# Altium PCB SDP.PcbDoc
Units mm, origin at the board's own origin, x right, y up, seen from the top; angles counter-clockwise.
Board outline 64 x 80 mm, 2 copper layers (Top Layer, Bottom Layer), stack 1.572 mm thick; 3 components, 0 nets, 43 pads, 0 vias.
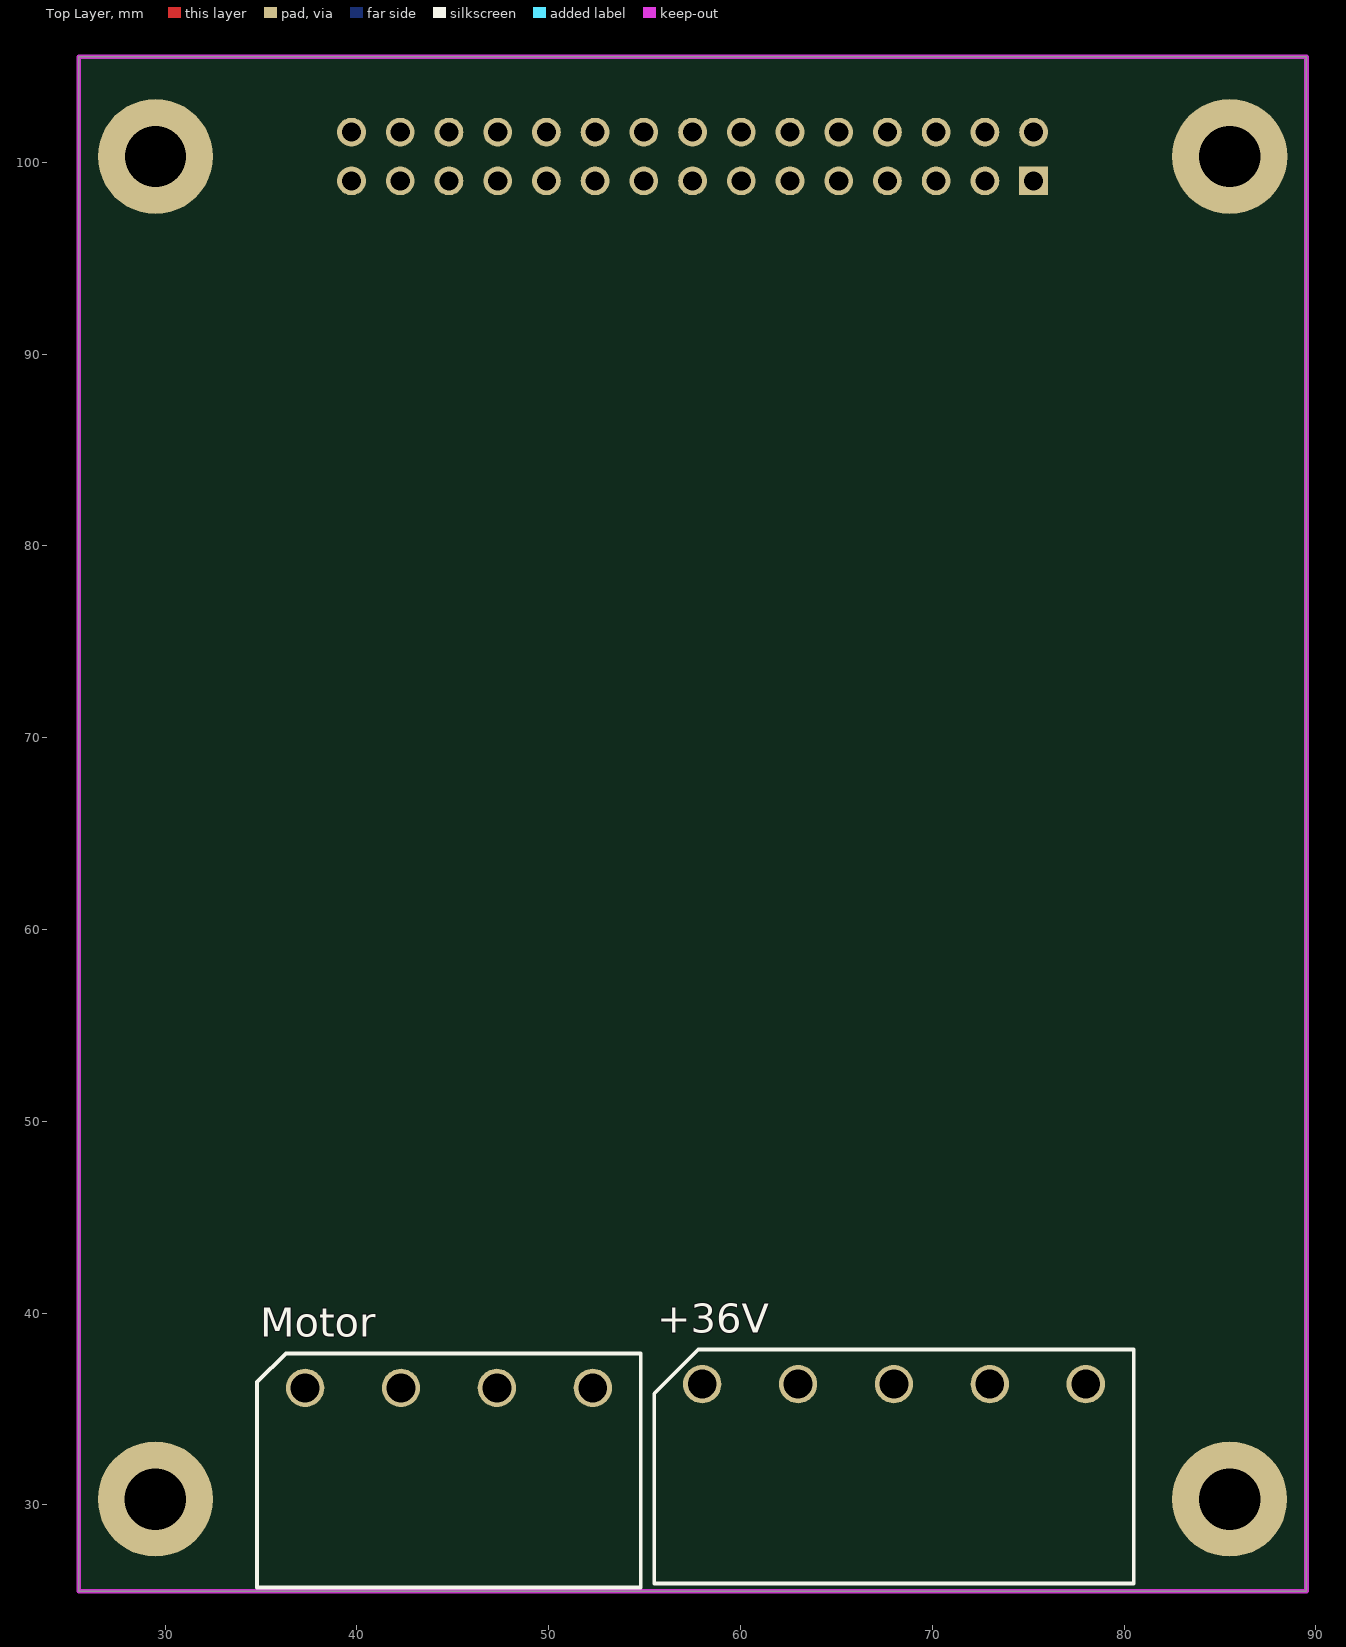
[diagram p0: Top Layer view]
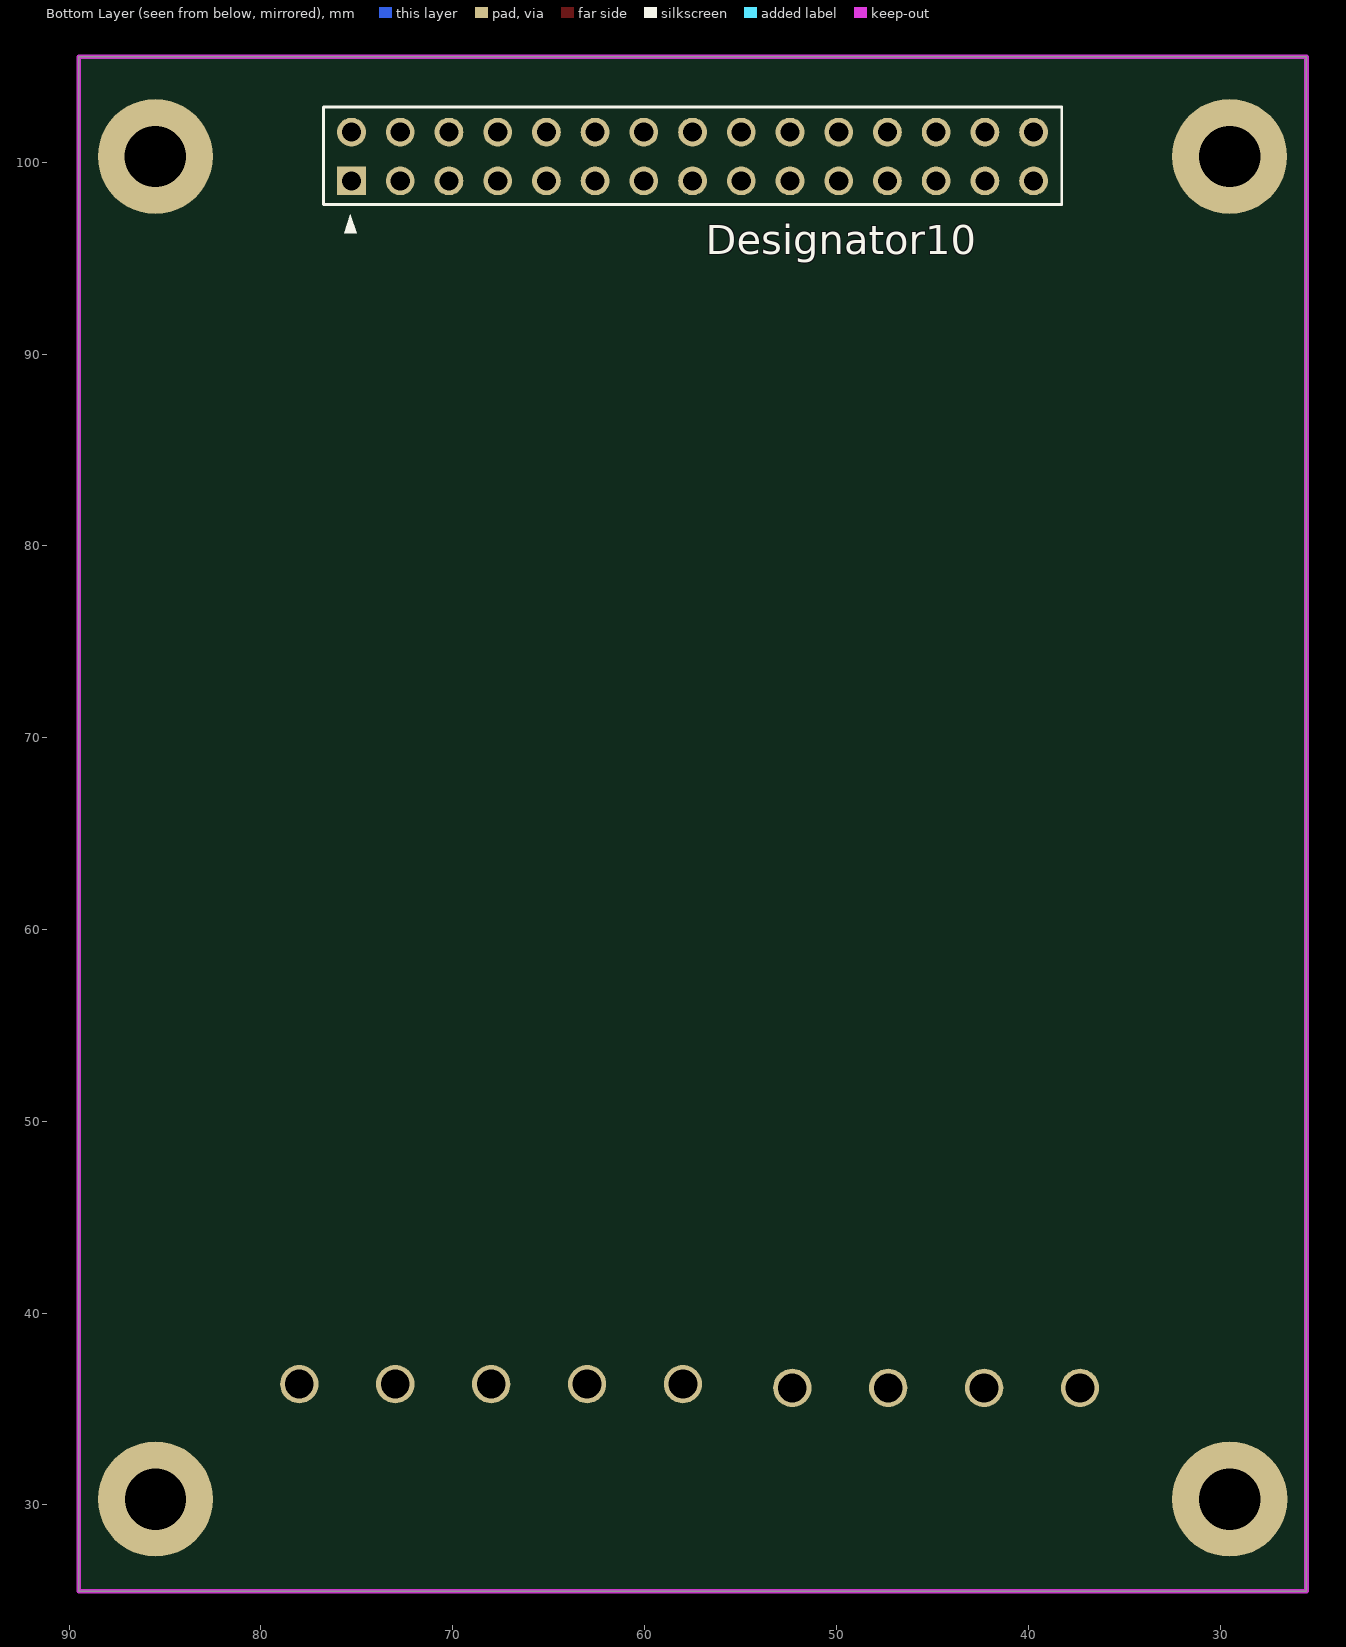
[diagram p1: Bottom Layer view, seen from below]

## Layer stack, top to bottom
Top Solder: solder mask 0.0102, Solder Resist, Dk 3.5
Top Layer: signal copper 0.0356
Dielectric 1: dielectric 1.5004, FR-4, Dk 4.8
Bottom Layer: signal copper 0.0356
Bottom Solder: solder mask 0.0102, Solder Resist, Dk 3.5

## Board outline
25.5,25.5 25.5,105.5 89.5,105.5 89.5,25.5

## Design rules (kind name [scope] priority, off if disabled: settings)
Clearance [All] p1: gap=0.254 ignorepadtopadclearanceinfootprint=FALSE except(0: Arc-Hole Track-Hole SMDPad-Hole THPad-Hole Via-Hole Fill-Hole Poly-Hole Region-Hole Text-Hole)
PolygonConnect [All] p1: connectstyle=Relief reliefconductorwidth=0.254 reliefentries=4 polygonreliefangle="90 Angle" airgapwidth=0.254
RoutingVias [All] p1: holewidth=0.711 width=1.27 viastyle="Through Hole" minholewidth=0.711 minwidth=1.27 maxholewidth=0.711 maxwidth=1.27
SolderMaskExpansion [All] p1: expansion=0.102 istentingtop=FALSE
Width [All] p1: maxlimit=0.254 minlimit=0.254 preferedwidth=0.254
30 further rules are at their usual default settings.

## Components (designator, comment, footprint, x,y, rotation, side; value= is the part's Value field where it differs from the comment)
+36V "Comment" "5 1x5 r" 68,36.3 r0 top
Designator10 "Comment" 2.54_30P_2X15_PLD 57.5,100.3 r180 bottom
Motor "Comment" "5 1x4 r" 44.8,36.1 r0 top

## Footprints (in the part's own frame and the unit in brackets; to place one, negate y for a bottom-side part, rotate by r counter-clockwise, add the part's x,y. Pads: shape width x height; smd on the part's side, far side on the other; paste and mask are expansions set on the pad)
2.54_30P_2X15_PLD [mm] "30 pin, 2x15, 2.54 mm pitch Male Box Header"
  rect 1.5x1.5 hole 1: 1(-17.78,-1.27)
  round 1.5 hole 1: 2(-17.78,1.27) 3(-15.24,-1.27) 4(-15.24,1.27) 5(-12.7,-1.27) 6(-12.7,1.27) 7(-10.16,-1.27) 8(-10.16,1.27) 9(-7.62,-1.27) 10(-7.62,1.27) 11(-5.08,-1.27) 12(-5.08,1.27) 13(-2.54,-1.27) 14(-2.54,1.27) 15(0,-1.27) 16(0,1.27) 17(2.54,-1.27) 18(2.54,1.27) 19(5.08,-1.27) 20(5.08,1.27) 21(7.62,-1.27) 22(7.62,1.27) 23(10.16,-1.27) 24(10.16,1.27) 25(12.7,-1.27) 26(12.7,1.27) 27(15.24,-1.27) 28(15.24,1.27) 29(17.78,-1.27) 30(17.78,1.27)
  silkscreen extent -19.25,-4 19.25,2.57, body extent -19.05,-2.54 19.05,2.54, height 8.6
"5 1x4 r" [mm]
  round 2 hole 1.5: 1(-7.5,0) 2(-2.5,0) 3(2.5,0) 4(7.5,0)
  silkscreen extent -10,-10.4 10,1.8, body extent -10,-19.2 10.1,1.7, height 15.1
"5 1x5 r" [mm]
  round 2 hole 1.5: 1(-10,0) 2(-5,0) 3(0,0) 4(5,0) 5(10,0)
  silkscreen extent -12.5,-10.4 12.5,1.8, body extent -12.5,-19.1 12.5,1.7, height 15.1

## Free pads (board coordinates)
  round 6 hole 3.2: 33(29.495,30.304) 33(29.5,100.3) 33(85.502,30.304) 33(85.507,100.3)

## Nets (pads, with @x,y where several pads share a name; then routed paths per layer and width w, separated by ;. In a path a pad name is that pad's centre, name@x,y a point inside that pad or via, vN(x,y) a via of type N, cw(c..) or ccw(c..) an arc to the next point about the centre after c; other vN are vias at no path point)
pads on no net: +36V.1 +36V.2 +36V.3 +36V.4 +36V.5 Designator10.1 Designator10.2 Designator10.3 Designator10.4 Designator10.5 Designator10.6 Designator10.7 Designator10.8 Designator10.9 Designator10.10 Designator10.11 Designator10.12 Designator10.13 Designator10.14 Designator10.15 Designator10.16 Designator10.17 Designator10.18 Designator10.19 Designator10.20 Designator10.21 Designator10.22 Designator10.23 Designator10.24 Designator10.25 Designator10.26 Designator10.27 Designator10.28 Designator10.29 Designator10.30 Motor.1 Motor.2 Motor.3 Motor.4

## Keep-outs
Keep-Out Layer:
  the board outline again, w0.254

## Dimensions
85.507,100.3 to 89.5,105.5 on Mechanical 1
29.5,100.3 to 25.5,105.5 on Mechanical 1
29.5,100.3 to 25.5,105.5 on Mechanical 1